# EAGLE board PickupPanel_simpler (EAGLE 7.4.0)
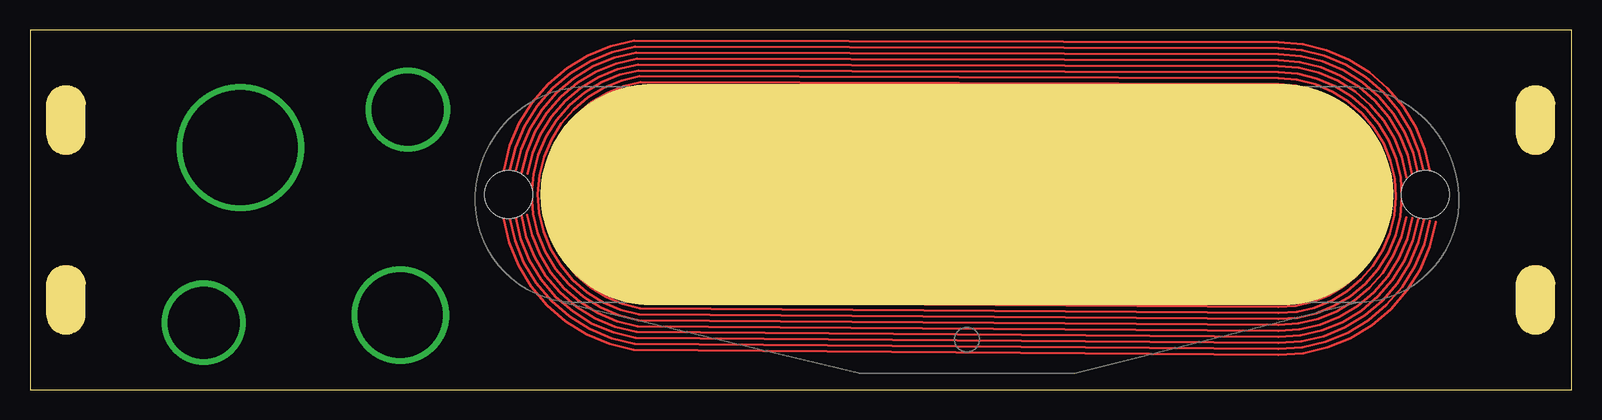
[diagram p0: board, top side]
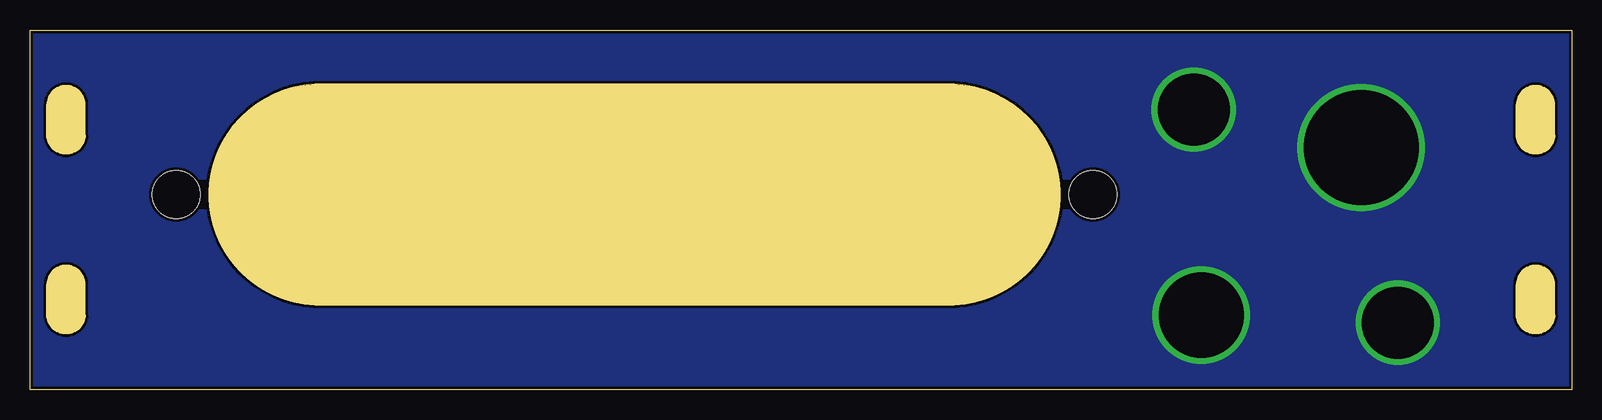
[diagram p1: board, bottom side, seen from below]

Size 128.5 x 30 mm. Coordinates in mm from the lower left corner, seen from the top.
Outline: 0,30 0,0 128.5,0 128.5,30 0,30
Copper layers (1*2*15*16): Top 0.035mm / dielectric 0.2mm / Route2 0.0175mm / dielectric 1.1mm / Route15 0.0175mm / dielectric 0.2mm / Bottom 0.035mm
Design rules "SeeedStudio_DRU_no_angle_20130527": minimum track width 6mil, minimum drill 12mil, track to track 6mil, track to pad 6mil, pad to pad 6mil, via to via 6mil, smd to smd 0mil, copper to edge 10mil, drill to drill 10mil, minimum pad ring 6mil, minimum via ring 6mil, stop-mask expansion 2mil, vias tented up to drill 25mil, thermal gap 10mil
Net classes: 0 default: width 0.203 mm; 1 power: width 0.406 mm; 2 ground: width 0.406 mm

## Footprints (pad centres in the part's own frame; a part is rotated, then mirrored left to right if it is on the bottom)
SINGLE_COIL_CUTOUT_MILLING = hole 4: -38.2,0; 38.2,0

## Placement (x,y rotation side)
U$2  [SLOT_HOLE]  3,7.5 90 top
U$3  [SLOT_HOLE]  3,22.5 90 top
U$4  [SLOT_HOLE]  125.5,7.5 90 top
U$5  [SLOT_HOLE]  125.5,22.5 90 top
U$6  [SINGLE_COIL_CUTOUT_MILLING]  78.11,16.27 0 top

## Library data of the parts
U$2-U$6 = MusicThingModular

## Tracks (layer width: path | path; a pad name or v marks a point on that pad's centre or on a via)
GND  (via drill 6, 7.1, 9.6)
  other vias: 31.5,23.36 14.48,5.58 30.86,6.21 17.52,20.18
  pour Bottom: -8.89,36.2 132.72,35.56 131.44,-0.64 -1.27,-1.27
N$1
  Top 0.2: 50.95,7.26 104.07,6.88 105.51,6.98 106.91,7.31 108.25,7.85 109.49,8.6 110.6,9.53 111.55,10.62 112.32,11.85 112.89,13.19 113.24,14.61 113.37,16.06 113.27,17.52 112.94,18.94 112.39,20.3 111.63,21.55 110.69,22.68 109.58,23.64 108.33,24.42 106.97,25 105.54,25.36 104.07,25.48 50.9,25.63 49.46,25.3 48.08,24.74 46.81,23.98 45.67,23.02 44.69,21.9 43.9,20.63 43.32,19.25 42.96,17.8 42.83,16.31 42.94,14.82 43.27,13.35 43.84,11.96 44.61,10.67 45.58,9.52 46.72,8.53 48.01,7.72 49.4,7.13 50.87,6.77 104.07,6.38 105.58,6.49 107.07,6.83 108.48,7.4 109.78,8.19 110.95,9.17 111.96,10.33 112.77,11.63 113.37,13.04 113.74,14.53 113.87,16.06 113.76,17.59 113.41,19.09 112.83,20.52 112.04,21.85 111.04,23.03 109.87,24.05 108.56,24.87 107.13,25.47 105.62,25.85 104.07,25.98 50.83,26.13 49.3,25.77 47.86,25.19 46.52,24.38 45.32,23.37 44.29,22.19 43.46,20.86 42.85,19.41 42.47,17.88 42.33,16.31 42.44,14.74 42.8,13.2 43.39,11.73 44.21,10.38 45.23,9.16 46.43,8.12 47.78,7.28 49.24,6.66 50.79,6.28 104.07,5.88 105.66,6 107.22,6.36 108.7,6.96 110.08,7.79 111.31,8.82 112.36,10.03 113.21,11.4 113.84,12.88 114.23,14.45 114.37,16.06 114.25,17.67 113.89,19.25 113.28,20.75 112.44,22.14 111.4,23.39 110.17,24.45 108.78,25.31 107.28,25.95 105.7,26.34 104.07,26.48 50.75,26.62 49.15,26.25 47.63,25.63 46.22,24.79 44.96,23.73 43.88,22.48 43.01,21.09 42.37,19.56 41.97,17.96 41.83,16.31 41.95,14.66 42.32,13.04 42.95,11.51 43.8,10.08 44.88,8.81 46.13,7.72 47.55,6.83 49.09,6.18 50.71,5.78 104.07,5.38 105.74,5.5 107.38,5.88 108.93,6.51 110.37,7.38 111.66,8.46 112.77,9.74 113.66,11.17 114.32,12.73 114.72,14.37
N$2
  Top 0.2: 117.19,13.98 116.69,11.96 115.89,10.04 114.79,8.27 113.43,6.7 111.84,5.36 110.07,4.29 108.15,3.5 106.13,3.03 104.07,2.88 50.32,3.31 48.32,3.81 46.42,4.61 44.66,5.69 43.11,7.04 41.78,8.61 40.72,10.37 39.95,12.27 39.48,14.27
N$3
  Top 0.2: 39.5,18.35 39.99,20.34 40.79,22.22 41.86,23.95 43.2,25.5 44.75,26.81 46.49,27.86 48.38,28.63 50.36,29.09 104.07,28.98 106.09,28.81 108.06,28.33 109.92,27.54 111.64,26.47 113.16,25.15 114.47,23.61 115.51,21.89 116.27,20.02 116.72,18.06
N$4
  Top 0.2: 116.2,14.14 115.74,12.27 115,10.49 113.98,8.86 112.72,7.41 111.25,6.17 109.61,5.18 107.84,4.46 105.97,4.02 104.07,3.88 50.48,4.3 48.62,4.76 46.87,5.5 45.25,6.5 43.81,7.75 42.59,9.2 41.61,10.82 40.9,12.58 40.47,14.43
N$5
  Top 0.2: 115.71,14.21 115.27,12.42 114.55,10.72 113.58,9.15 112.37,7.76 110.96,6.57 109.39,5.62 107.68,4.93 105.9,4.51 104.07,4.38 50.56,4.79 48.78,5.23 47.1,5.94 45.55,6.91 44.17,8.1 42.99,9.49 42.06,11.05 41.37,12.73 40.96,14.5
N$6
  Top 0.2: 115.22,14.29 114.79,12.57 114.1,10.95 113.17,9.45 112.02,8.11 110.67,6.98 109.16,6.07 107.53,5.41 105.82,5.01 104.07,4.88 50.63,5.29 48.93,5.71 47.32,6.39 45.84,7.31 44.52,8.45 43.4,9.79 42.5,11.28 41.85,12.89 41.45,14.58
N$7
  Top 0.2: 116.7,14.06 116.22,12.11 115.44,10.26 114.38,8.56 113.08,7.05 111.55,5.76 109.84,4.73 107.99,3.98 106.05,3.53 104.07,3.38 50.4,3.81 48.47,4.28 46.64,5.05 44.96,6.1 43.46,7.39 42.19,8.91 41.16,10.6 40.42,12.43 39.97,14.35
N$8
  Top 0.2: 116.23,17.98 115.79,19.87 115.06,21.66 114.06,23.32 112.81,24.8 111.34,26.07 109.69,27.09 107.9,27.85 106.01,28.32 104.07,28.48 50.43,28.6 48.53,28.15 46.72,27.42 45.05,26.4 43.55,25.14 42.27,23.66 41.23,21.99 40.47,20.18 40,18.27
N$9
  Top 0.2: 115.74,17.91 115.31,19.71 114.62,21.43 113.66,23.02 112.46,24.45 111.05,25.66 109.47,26.65 107.75,27.38 105.93,27.82 104.07,27.98 50.51,28.1 48.69,27.68 46.95,26.97 45.34,26 43.9,24.79 42.67,23.36 41.68,21.77 40.94,20.03 40.49,18.2
N$10
  Top 0.2: 115.24,17.83 114.84,19.56 114.17,21.2 113.25,22.73 112.1,24.09 110.75,25.26 109.24,26.2 107.59,26.9 105.85,27.33 104.07,27.48 50.59,27.61 48.84,27.2 47.18,26.52 45.63,25.6 44.26,24.43 43.08,23.07 42.12,21.54 41.42,19.87 40.98,18.12
N$11
  Top 0.2: 114.75,17.75 114.36,19.4 113.72,20.98 112.85,22.44 111.75,23.74 110.46,24.86 109.01,25.76 107.44,26.42 105.78,26.84 104.07,26.98 50.67,27.11 49,26.73 47.4,26.08 45.93,25.19 44.61,24.08 43.48,22.78 42.57,21.31 41.9,19.72 41.48,18.04